# EAGLE board SK3000v2 (EAGLE 7.1.0)
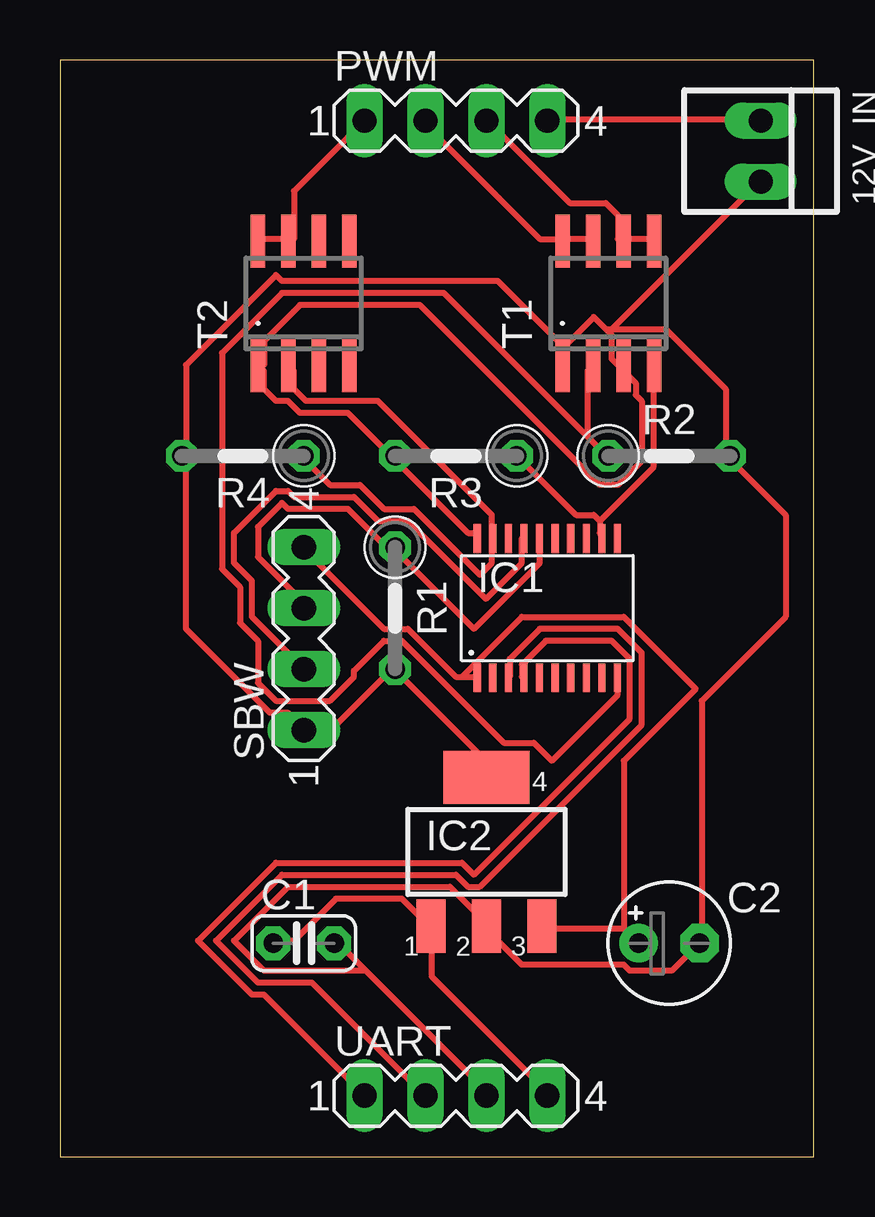
[diagram p0: board, top side]

Size 31.42 x 45.71 mm. Coordinates in mm from the lower left corner, seen from the top.
Outline: 0,0 31.42,0 31.42,45.71 0,45.71 0,0
Copper layers (1*16): Top 0.035mm / dielectric 1.5mm / Bottom 0.035mm
Design rules "default": minimum track width 10mil, minimum drill 24mil, track to track 8mil, track to pad 8mil, pad to pad 8mil, via to via 8mil, smd to smd 8mil, copper to edge 40mil, drill to drill 8mil, minimum pad ring 10mil, minimum via ring 8mil, stop-mask expansion 4mil, vias tented up to drill 0mil, thermal gap 10mil

## Footprints (pad centres in the part's own frame; a part is rotated, then mirrored left to right if it is on the bottom)
22-23-2021 = drill 1 long: 1 -1.27,0; 2 1.27,0
C025-024X044 = drill 0.813 pad 1.422 octagon: 1 -1.27,0; 2 1.27,0
E2,5-5 = drill 0.813 pad 1.6: + -1.27,0 | drill 0.813 pad 1.6 octagon: - 1.27,0
PW20 = smd 0.3 x 1.2: 1 -2.925,-2.9; 2 -2.275,-2.9; 3 -1.625,-2.9; 4 -0.975,-2.9; 5 -0.325,-2.9; 6 0.325,-2.9; 7 0.975,-2.9; 8 1.625,-2.9; 9 2.275,-2.9; 10 2.925,-2.9; 11 2.925,2.9; 12 2.275,2.9; 13 1.625,2.9; 14 0.975,2.9; 15 0.325,2.9; 16 -0.325,2.9; 17 -0.975,2.9; 18 -1.625,2.9; 19 -2.275,2.9; 20 -2.925,2.9
SOT223 = smd 1.219 x 2.235: 1 -2.311,-3.099; 2 0,-3.099; 3 2.311,-3.099 | smd 3.6 x 2.2: 4 0,3.099
MA04-1 = drill 1.016 long: 1 -3.81,0; 2 -1.27,0; 3 1.27,0; 4 3.81,0
0207/5V = drill 0.813 octagon: 1 -2.54,0; 2 2.54,0
SO8 = smd 0.6 x 2.2: 1 -1.905,-2.6; 2 -0.635,-2.6; 3 0.635,-2.6; 4 1.905,-2.6; 5 1.905,2.6; 6 0.635,2.6; 7 -0.635,2.6; 8 -1.905,2.6

## Placement (x,y rotation side)
12V_IN  22-23-2021  [22-23-2021]  29.21,41.91 270 top
C1  100nF  [C025-024X044]  10.16,8.89 0 top
C2  10uF  [E2,5-5]  25.4,8.89 0 top
IC1  MSP430G2553  [PW20]  20.32,22.86 0 top
IC2  LM2936MP-3.3  [SOT223]  17.78,12.7 0 top
PWM  [MA04-1]  16.51,43.18 0 top
R1  47k  [0207/5V]  13.97,22.86 270 top
R2  [0207/5V]  25.4,29.21 0 top
R3  [0207/5V]  16.51,29.21 180 top
R4  [0207/5V]  7.62,29.21 180 top
SBW  [MA04-1]  10.16,21.59 90 top
T1  DMN3024LSD  [SO8]  22.86,35.56 0 top
T2  DMN3024LSD  [SO8]  10.16,35.56 0 top
UART  [MA04-1]  16.51,2.54 0 top

## Library data of the parts
12V_IN = con-molex; MF: MOLEX; MPN: 22-23-2021; OC_FARNELL: 1462926; OC_NEWARK: 25C3832
C1 C2 = adafruit
IC1 = ti_msp430
IC2 = national-semiconductor; MF: NATIONAL SEMICONDUCTOR; MPN: LM2936MP-3.3/NOPB; OC_FARNELL: 1469062; OC_NEWARK: 41K4523
PWM SBW UART = con-lstb; OC_FARNELL: unknown; OC_NEWARK: unknown
R1-R4 = rcl
T1 T2 = zetex; OC_FARNELL: unknown; OC_NEWARK: unknown

## Nets
12V: 12V_IN.1 PWM.4
+3V3: C2.+ IC1.1 IC2.3 SBW.4
+5V: C1.1 IC2.1 UART.4
GND: 12V_IN.2 C1.2 C2.- IC1.20 IC2.2 IC2.4 R1.2 R2.2 R3.2 R4.2 SBW.1 T1.1 T1.3 T2.1 UART.3
MSP_PWM_BLUE: IC1.19 R4.1 T2.2
MSP_PWM_GREEN: IC1.12 R3.1 T1.4
MSP_PWM_RED: IC1.10 R2.1 T1.2
MSP_RST: IC1.16 R1.1 SBW.3
MSP_RX: IC1.4 UART.1
MSP_TEST: IC1.17 SBW.2
MSP_TX: IC1.3 UART.2
N$32: IC1.2
N$33: IC1.8
N$34: IC1.9
N$36: IC1.13
N$37: IC1.11
PWM_BLUE: PWM.1 T2.7 T2.8
PWM_GREEN: PWM.3 T1.5 T1.6
PWM_RED: PWM.2 T1.7 T1.8

## Tracks (layer width: path | path; a pad name or v marks a point on that pad's centre or on a via)
12V
  Top 0.254: 12V_IN.1 29,43.25 20.5,43.25 PWM.4
+3V3
  Top 0.254: 23.5,9.5 20.25,9.5 IC2.3 | 23.5,9.5 24,9 C2.+ | 16.75,20 16.5,20 14.5,22 13.5,22 10.25,25.25 SBW.4 | 16.75,20 17.25,20 IC1.1 | 23.5,9.5 23.5,16.5 26.5,19.5 23.5,22.5 19.25,22.5 16.75,20
+5V
  Top 0.254: UART.4 20.25,2.75 15.5,7.5 15.5,9.5 IC2.1 15.25,9.75 14.25,10.75 11.5,10.75 9.75,9 9,9 C1.1
GND
  Top 0.254: IC2.4 17.75,16 17.75,16.5 14,20.25 R1.2 13.75,20.25 10.75,17.25 10.25,17.75 SBW.1 10,18 9.5,18.5 8.75,18.5 5.25,22 5.25,29 R4.2 5.25,29.25 5.25,33 9,36.75 9.25,36.5 18.25,36.5 21,33.75 | 12.75,7.75 17.75,2.75 UART.3 | 12.75,7.75 11.75,8.75 11.5,8.75 C1.2 | 12.75,7.75 8.5,7.75 7.25,9 9.5,11.25 16.25,11.25 17.75,9.75 IC2.2 18,9.5 18,9.25 19.25,8 23.5,8 23.75,7.75 25.5,7.75 26.5,8.75 C2.- 26.75,9 26.75,19 30.25,22.5 30.25,26.75 28,29 R2.2 27.75,29.25 27.75,32 25.25,34.5 23,34.5 | IC1.20 17.25,26 17,26 14,29 R3.2 13.75,29.25 12,31 10,31 9.5,31.5 9,31.5 8.5,32 8.5,32.75 T2.1 8.5,33 8.5,34 10,35.5 15,35.5 22.5,28 23.25,28 24.25,29 24.25,31.5 24,31.75 24,32.25 23.5,32.75 T1.3 23.25,33 23,33.25 23,34.25 22.75,34.5 | 21,33.75 21,33 T1.1 21,33.75 | 21,33.75 22.25,35 22.75,34.5 | 22.75,34.5 23,34.5 | 23,34.5 29,40.5 12V_IN.2
MSP_PWM_BLUE
  Top 0.254: R4.1 10.25,29 11.25,28 12.5,28 13.5,27 14.75,27 17.5,24.25 18,24.75 18,25.75 IC1.19 18,26 18,26.75 13.25,31.5 10.25,31.5 9.75,32 9.75,32.75 T2.2
MSP_PWM_GREEN
  Top 0.254: 22.5,26.5 22.5,26 IC1.12 | 22.5,26.5 22.25,26.75 21.5,26.75 19.25,29 R3.1 | 22.5,26.5 24.75,28.75 24.75,32.75 T1.4
MSP_PWM_RED
  Top 0.254: 22,30 22.75,29.25 R2.1 | 22,30 16,36 9.25,36 6.75,33.5 6.75,24.5 7.5,23.75 7.5,22.25 8.25,21.5 8.25,19.75 9,19 11.25,19 12.25,20 12.25,20.25 13.5,21.5 14.25,21.5 18.5,17.25 19.75,17.25 20.5,16.5 23.25,19.25 23.25,19.75 IC1.10 | 22,30 22,32.75 T1.2
MSP_RST
  Top 0.254: IC1.16 20,24.75 17.25,22 14,25.25 R1.1 13.75,25.25 12,27 9.5,27 9.25,27.25 8.25,26.25 8.25,25 10,23.25 10,23 SBW.3
MSP_RX
  Top 0.254: IC1.4 19.25,20 19.25,20.5 20.25,21.5 23,21.5 23.75,20.75 23.75,18.25 17.25,11.75 16.75,12.25 9,12.25 5.75,9 8,6.75 8.5,6.75 12.5,2.75 UART.1
MSP_TEST
  Top 0.254: IC1.17 19.25,25.75 19.25,24.75 17.75,23.25 14.5,26.5 13.25,26.5 12.25,27.5 9.75,27.5 9.5,27.75 9,27.75 7.25,26 7.25,24.75 8,24 8,22.5 10,20.5 SBW.2
MSP_TX
  Top 0.254: IC1.3 18.75,20 18.75,20.75 20,22 23.25,22 24.25,21 24.25,18 17.5,11.25 17,11.25 16.5,11.75 9.25,11.75 6.5,9 8.25,7.25 10.5,7.25 15,2.75 UART.2
PWM_BLUE
  Top 0.254: T2.8 8.5,38.25 9.5,38.25 T2.7 9.75,38.25 9.75,40.25 12.5,43 PWM.1
PWM_GREEN
  Top 0.254: T1.5 24.75,38.25 23.5,38.25 T1.6 23.25,38.25 23.25,39.25 22.75,39.75 21.25,39.75 18,43 PWM.3
PWM_RED
  Top 0.254: T1.7 22,38.25 21,38.25 T1.8 20.75,38.25 20,38.25 15.25,43 PWM.2